# EAGLE board Brilliant Lahdi-Lappi (EAGLE 9.7.0)

Size 357.06 x 120.79 mm. Coordinates in mm from the lower left corner, seen from the top.
Outline: 0,0 357.06,0 357.06,120.79 0,120.79 0,0
Copper layers (1*16): Top 0.035mm / dielectric 1.5mm / Bottom 0.035mm
Design rules "default": minimum track width 6mil, minimum drill 0.35mm, track to track 6mil, track to pad 6mil, pad to pad 6mil, via to via 6mil, smd to smd 6mil, copper to edge 40mil, drill to drill 6mil, minimum pad ring 10mil, minimum via ring 8mil, stop-mask expansion 4mil, vias tented up to drill 0mil, thermal gap 10mil

## Footprints (pad centres in the part's own frame; a part is rotated, then mirrored left to right if it is on the bottom)
LU-5-R = drill 0.8: 1 -6.35,-3.81; 5 3.81,-3.81; 6 6.35,-3.81; 7 6.35,3.81; 8 3.81,3.81; 12 -6.35,3.81
1X02 = drill 1.016 long: 1 -1.27,0; 2 1.27,0
MOTOR = drill 1.118 pad 3.15 octagon: + 2.54,0; - -2.54,0
BATTERY-GENERIC = drill 1.118 pad 3.15 octagon: + 2.54,0; - -2.54,0
28027 = drill 1.016 long: 1 -2.54,0; 2 0,0; 3 2.54,0
GL5528 = drill 0.8 pad 1.4: 1 -1.702,0; 2 1.702,0
RESAD1016W63L850D250B = drill 0.83 pad 1.43: 1 -5.08,0; 2 5.08,0
ARDUINO-UNO-R3-SHIELD = drill 1.016 pad 1.88: 3.3V 24.13,-2.54; 5V 24.13,0; A0 24.13,12.7; A1 24.13,15.24; A2 24.13,17.78; A3 24.13,20.32; A4 24.13,22.86; A5 24.13,25.4; AREF -24.13,-13.97; D2 -24.13,20.32; D3 -24.13,17.78; D4 -24.13,15.24; D5 -24.13,12.7; D6 -24.13,10.16; D7 -24.13,7.62; D8 -24.13,3.81; D9 -24.13,1.27; D10 -24.13,-1.27; D11 -24.13,-3.81; D12 -24.13,-6.35; D13 -24.13,-8.89; GND@0 24.13,2.54; GND@1 24.13,5.08; GND@2 -24.13,-11.43; IOREF 24.13,-7.62; NC 24.13,-10.16; RES 24.13,-5.08; RX -24.13,25.4; SCL -24.13,-19.05; SDA -24.13,-16.51; TX -24.13,22.86; VIN 24.13,7.62
TO92 = drill 0.813 octagon: 1 -1.27,0; 2 0,1.905; 3 1.27,0

## Placement (x,y rotation side)
K1  RELAY-SPDT_LU-5-R  [LU-5-R]  262.39,77.41 180 top
K2  RELAY-SPDT_LU-5-R  [LU-5-R]  262.77,40.86 180 top
L1  LIGHTBULB  [1X02]  344.47,91.79 0 top
M1  MOTOR_HDR  [MOTOR]  348.8,41.79 0 top
P1  BATTERYGENERIC  [BATTERY-GENERIC]  261.16,99.52 180 top
PIR1  PIR-SENSOR_28027  [28027]  197.02,109.8 0 top
R2  PHOTOCELL_GL5528  [GL5528]  108.05,111.87 0 top
R3  1k  [RESAD1016W63L850D250B]  128.78,99.11 90 top
U1  ARDUINO-UNO-R3-SHIELD  [ARDUINO-UNO-R3-SHIELD]  47.88,29.84 270 top
U2  TMP36GT9Z_TO92  [TO92]  153.88,114.69 0 top

## Library data of the parts
K1 K2 L1 M1 P1 PIR1 R2 R3 U1 U2 = Tinkercad

## Nets
L1_1: K1.6 L1.1
M1_+: K2.6 M1.+
P1+: K1.1 K2.1 P1.+
P1-: L1.2 M1.- P1.-
U1_A4: U1.A4 U2.2
U1_A5: PIR1.2 R2.1 R2.2 R3.2 U1.5V U1.A5 U2.3
U1_D5: K1.5 U1.D5
U1_D6: K2.8 U1.D6
U1_D8: PIR1.1 U1.D8
U1_GND: K1.8 K2.5 PIR1.3 R3.1 U1.GND@0 U1.GND@1 U1.GND@2 U2.1

## Tracks (layer width: path | path; a pad name or v marks a point on that pad's centre or on a via)
L1_1  (1 unrouted)
M1_+  (1 unrouted)
P1+  (2 unrouted)
P1-  (2 unrouted)
U1_A4  (1 unrouted)
U1_A5  (6 unrouted)
U1_D5  (1 unrouted)
U1_D6  (1 unrouted)
U1_D8  (1 unrouted)
U1_GND  (7 unrouted)